# EAGLE board HyperArmBoard_REV2 (EAGLE 8.6.0)
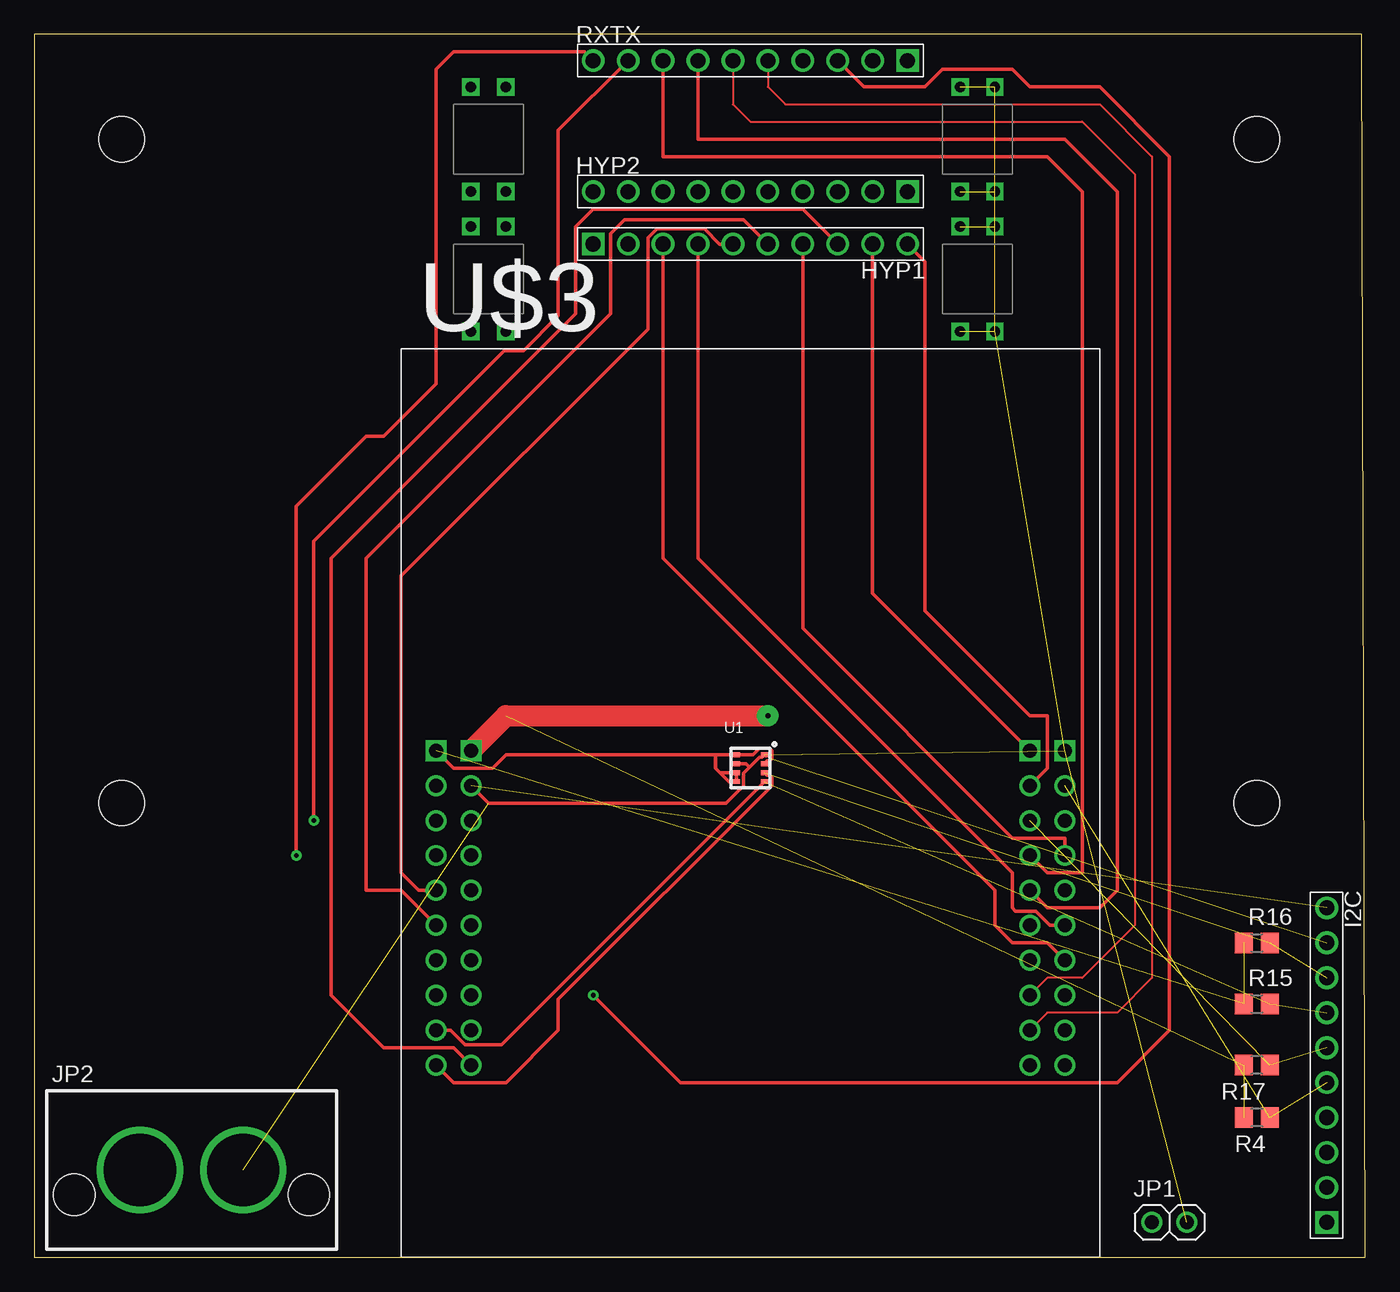
[diagram p0: board, top side]
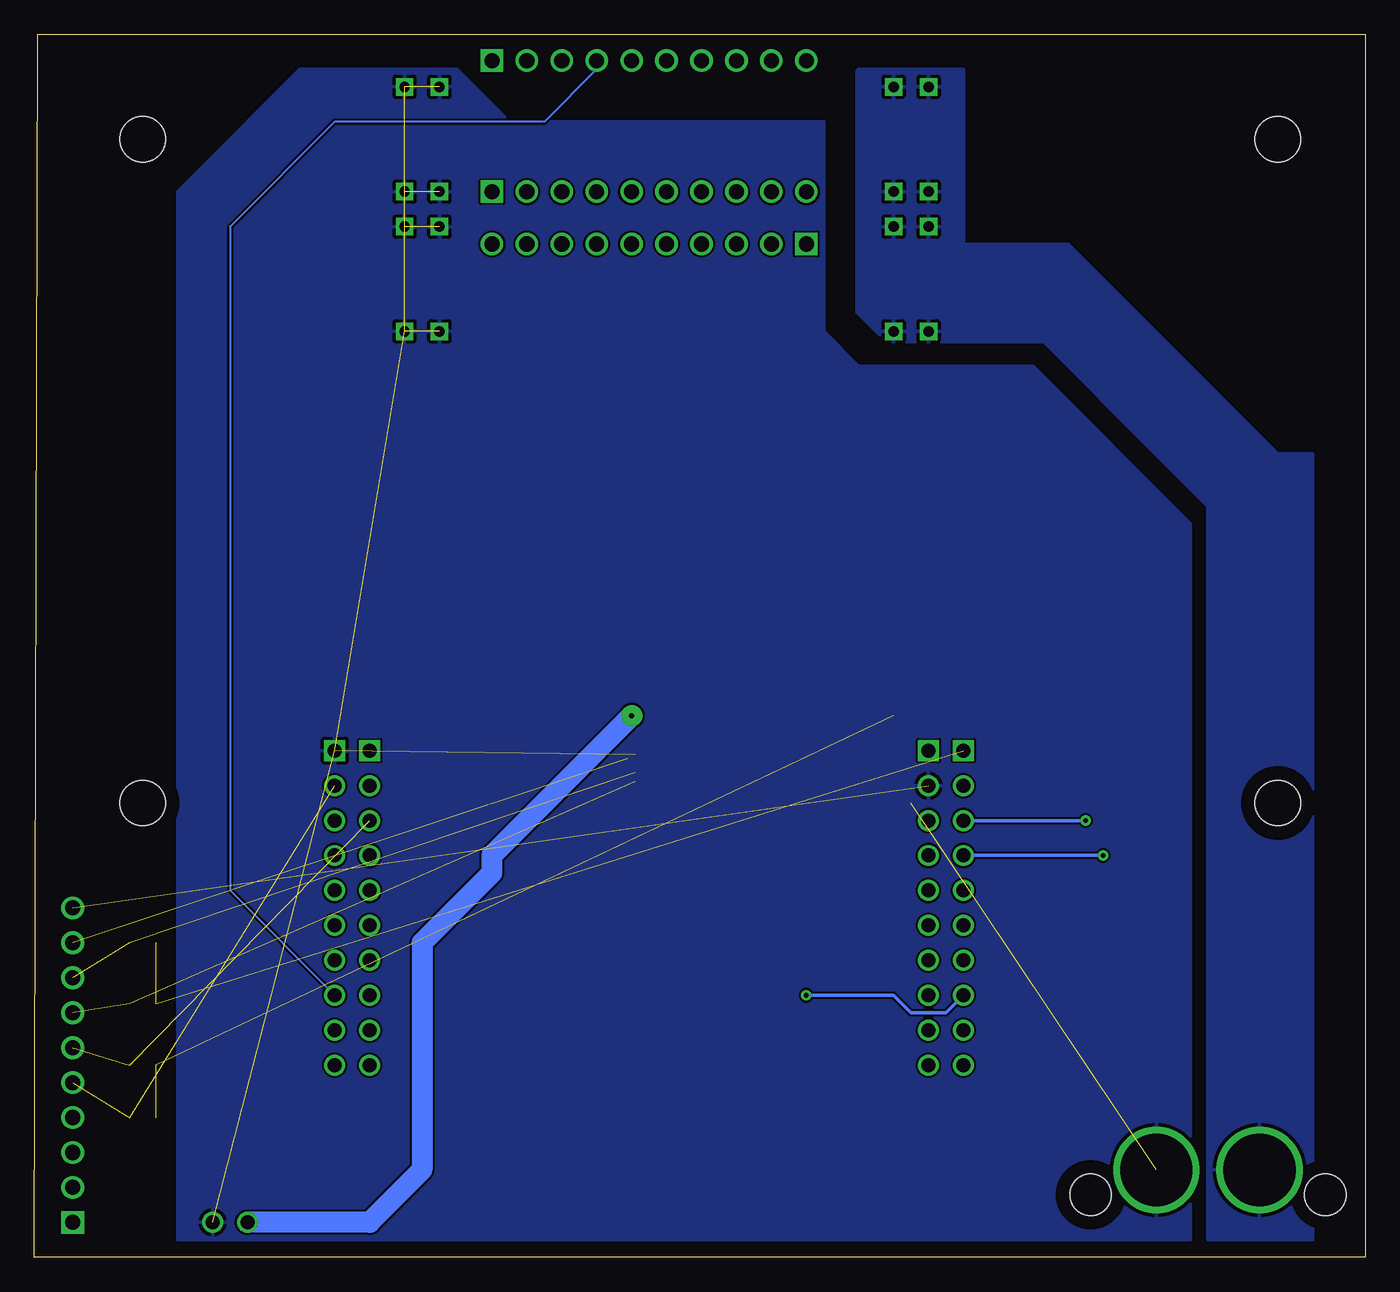
[diagram p1: board, bottom side, seen from below]

Size 96.77 x 88.9 mm. Coordinates in mm from the lower left corner, seen from the top.
Outline: 0,0 96.77,0 96.52,88.9 0,88.9 0,0
Copper layers (1*16): Top 0.035mm / dielectric 1.5mm / Bottom 0.035mm
Design rules "default": minimum track width 6mil, minimum drill 0.35mm, track to track 6mil, track to pad 6mil, pad to pad 6mil, via to via 6mil, smd to smd 6mil, copper to edge 40mil, drill to drill 6mil, minimum pad ring 10mil, minimum via ring 8mil, stop-mask expansion 4mil, vias tented up to drill 0mil, thermal gap 10mil
Holes 3.3 mm at 6.35,33.02 88.9,81.28 88.9,33.02 6.35,81.28

## Footprints (pad centres in the part's own frame; a part is rotated, then mirrored left to right if it is on the bottom)
KK254_10-PIN = drill 1.1 square: P$1 11.43,0 | drill 1.1: P$2 8.89,0; P$3 6.35,0; P$4 3.81,0; P$5 1.27,0; P$6 -1.27,0; P$7 -3.81,0; P$8 -6.35,0; P$9 -8.89,0; P$10 -11.43,0
1X02 = drill 1.016: 1 -1.27,0; 2 1.27,0
SUPERSABRE_2CIRCUIT = drill 5.25: P$1 -3.747,0; P$2 3.747,0 | hole 2.997: -8.534,-1.803; 8.534,-1.803
R0805 = smd 1.3 x 1.5: 1 -0.95,0; 2 0.95,0
BME280_LGA = smd 0.5 x 0.35: P$1 1.025,0.975; P$2 1.025,0.325; P$3 1.025,-0.325; P$4 1.025,-0.975; P$5 -1.025,-0.975; P$6 -1.025,-0.325; P$7 -1.025,0.325; P$8 -1.025,0.975
TIVA-C_EVAL = drill 1.016 square: 1-1 -22.86,3.81; 2-1 22.86,3.81; 3-1 -20.32,3.81; 4-1 20.32,3.81 | drill 1.016: 1-2 -22.86,1.27; 1-3 -22.86,-1.27; 1-4 -22.86,-3.81; 1-5 -22.86,-6.35; 1-6 -22.86,-8.89; 1-7 -22.86,-11.43; 1-8 -22.86,-13.97; 1-9 -22.86,-16.51; 1-10 -22.86,-19.05; 2-2 22.86,1.27; 2-3 22.86,-1.27; 2-4 22.86,-3.81; 2-5 22.86,-6.35; 2-6 22.86,-8.89; 2-7 22.86,-11.43; 2-8 22.86,-13.97; 2-9 22.86,-16.51; 2-10 22.86,-19.05; 3-2 -20.32,1.27; 3-3 -20.32,-1.27; 3-4 -20.32,-3.81; 3-5 -20.32,-6.35; 3-6 -20.32,-8.89; 3-7 -20.32,-11.43; 3-8 -20.32,-13.97; 3-9 -20.32,-16.51; 3-10 -20.32,-19.05; 4-2 20.32,1.27; 4-3 20.32,-1.27; 4-4 20.32,-3.81; 4-5 20.32,-6.35; 4-6 20.32,-8.89; 4-7 20.32,-11.43; 4-8 20.32,-13.97; 4-9 20.32,-16.51; 4-10 20.32,-19.05
4-PIN-BIGPOWER = drill 0.762 square: P$1 -1.27,3.81; P$2 1.27,3.81; P$3 1.27,-3.81; P$4 -1.27,-3.81

## Placement (x,y rotation side)
HYP1  KK254_10-PIN  [KK254_10-PIN]  52.07,73.66 180 top
HYP2  KK254_10-PIN  [KK254_10-PIN]  52.07,77.47 0 top
I2C  KK254_10-PIN  [KK254_10-PIN]  93.98,13.97 270 top
JP1  [1X02]  82.55,2.54 0 top
JP2  PWR  [SUPERSABRE_2CIRCUIT]  11.43,6.35 0 top
R4  5k  [R0805]  88.9,10.16 180 top
R15  5k  [R0805]  88.9,18.41 0 top
R16  5k  [R0805]  88.9,22.86 0 top
R17  5k  [R0805]  88.9,13.97 180 top
RXTX  KK254_10-PIN  [KK254_10-PIN]  52.07,87 0 top
U1  BME280  [BME280_LGA]  52.07,35.56 0 top
U$3  TIVA-C_EVAL  [TIVA-C_EVAL]  52.07,33.02 0 top
U$4  BCS-106-L-D-PE-BE  [4-PIN-BIGPOWER]  33.02,81.28 0 top
U$5  BCS-106-L-D-PE-BE  [4-PIN-BIGPOWER]  33.02,71.12 0 top
U$6  BCS-106-L-D-PE-BE  [4-PIN-BIGPOWER]  68.58,71.12 0 top
U$7  BCS-106-L-D-PE-BE  [4-PIN-BIGPOWER]  68.58,81.28 0 top

## Library data of the parts
HYP1 HYP2 I2C JP2 RXTX = molex
JP1 = pinhead
R4 R15-R17 = resistor
U1 = BME280ComponentLibrary; PROD_ID: IC-13090
U$3 = texas
U$4-U$7 = samtec

## Nets
3.3V: I2C.P$9 R15.1 R16.1 U1.P$2 U1.P$5 U1.P$6 U1.P$8 U$3.1-1
5V: JP1.1 R4.2 R17.2 U$3.3-1
BIGVIN: JP2.P$1 U$4.P$1 U$4.P$2 U$4.P$3 U$4.P$4 U$5.P$1 U$5.P$2 U$5.P$3 U$5.P$4
CS_0: U$3.2-9
CS_2: U$3.1-2
DGND: I2C.P$10 JP1.2 JP2.P$2 U1.P$1 U1.P$7 U$3.2-1 U$3.3-2 U$6.P$1 U$6.P$2 U$6.P$3 U$6.P$4 U$7.P$1 U$7.P$2 U$7.P$3 U$7.P$4
MISO_0: RXTX.P$4 U$3.2-8
MISO_3: U$3.3-5
MOSI_0: RXTX.P$3 U$3.1-8
MOSI_3: U$3.3-6
PE2: U$3.3-8
PE3: U$3.3-9
PUSH1: U$3.4-10
PWM0: HYP1.P$3 U$3.2-7
PWM1: HYP1.P$4 U$3.2-6
PWM2: HYP1.P$5 U$3.1-5
PWM3: HYP1.P$6 U$3.1-6
PWM4: HYP1.P$7 U$3.2-4
PWM5: HYP1.P$8 U$3.3-10
PWM6: HYP1.P$9 U$3.4-1
PWM7: HYP1.P$10 U$3.4-2
RES: U$3.2-5
RX_CF: U$3.2-3
RX_MC: RXTX.P$8 U$3.4-4
RX_MD: RXTX.P$6 U$3.4-8
RX_MF: RXTX.P$9 U$3.1-3
RX_SF: U$3.4-6
SCK_0: U$3.2-10
SCL_0: I2C.P$5 R4.1 U$3.2-2
SCL_1: I2C.P$7 R15.2 U1.P$4 U$3.1-9
SDA_0: I2C.P$6 R17.1 U$3.4-3
SDA_1: I2C.P$8 R16.2 U1.P$3 U$3.1-10
SPI_CLK_2: U$3.1-7
TX_CF: U$3.3-7
TX_MC: RXTX.P$7 U$3.4-5
TX_MD: RXTX.P$5 U$3.4-9
TX_MF: RXTX.P$10 U$3.1-4
TX_SF: U$3.4-7

## Tracks (layer width: path | path; a pad name or v marks a point on that pad's centre or on a via)
3.3V  (3 unrouted)
  Top 0.254: 49.53,36.53 U1.P$8 52.27,36.53 52.73,36.99 53.46,36.99 53.62,36.83 53.62,36.24 53.46,36.08 53.29,36.08 U1.P$2 | 49.53,36.53 34.29,36.53 33.31,35.56 30.48,35.56 U$3.1-1 | 49.53,36.53 49.53,35.56 49.85,35.23 | 49.85,35.23 50.51,34.59 U1.P$5 U1.P$6 49.85,35.23
5V  (via drill 0.35 pad 1.55)  (2 unrouted)
  Top 1.524: U$3.3-1 34.29,39.37 v53.34,39.37
  Bottom 1.524: JP1.1 72.39,2.54 68.58,6.35 68.58,22.86 63.5,27.94 63.5,29.21 v53.34,39.37
BIGVIN
  pour Bottom: 3.81,1.27 11.43,1.27 11.43,54.61 15.24,58.42 23.37,66.55 24.51,66.55 34.8,66.55 36.96,68.71 36.96,86.23 36.83,86.36 29.21,86.36 29.21,73.66 21.59,73.66 6.35,58.42 3.81,58.42
DGND  (12 unrouted)
  Top 0.254: U1.P$1 52.9,36.34 52.73,36.34 52.01,35.62 | 52.01,35.62 51.57,35.19 51.57,34.29 50.3,33.02 33.02,33.02 U$3.3-2 | U1.P$7 51.74,35.88 52.01,35.62
  pour Bottom: 12.7,1.27 12.7,53.34 24.13,64.77 36.83,64.77 39.37,67.31 39.37,82.55 62.23,82.55 66.04,86.36 77.47,86.36 85.09,78.74 86.36,77.47 86.36,1.27
MISO_0
  Bottom 0.152: RXTX.P$4 55.88,86.36 59.69,82.55 74.93,82.55 82.55,74.93 82.55,26.67 U$3.2-8
MOSI_0  (via drill 0.35)
  Top 0.254: RXTX.P$3 60.33,85.09 64.77,85.09 66.04,86.36 71.12,86.36 72.39,85.09 77.47,85.09 82.55,80.01 82.55,16.51 78.74,12.7 46.99,12.7 v40.64,19.05
  Bottom 0.254: v40.64,19.05 34.29,19.05 33.02,17.78 30.48,17.78 U$3.1-8
PWM0
  Top 0.254: HYP1.P$3 45.72,50.8 69.85,26.67 69.85,24.13 71.12,22.86 73.66,22.86 U$3.2-7
PWM1
  Top 0.254: U$3.2-6 73.86,24.13 72.82,25.17 71.35,25.17 71.12,25.4 71.12,27.94 48.26,50.8 HYP1.P$4
PWM2
  Top 0.254: HYP1.P$5 49.82,73.66 48.72,74.76 45.26,74.76 44.62,74.12 44.62,67.48 26.67,49.53 26.67,27.94 27.94,26.67 U$3.1-5
PWM3
  Top 0.254: U$3.1-6 26.67,26.67 24.13,26.67 24.13,50.8 41.91,68.58 41.91,74.42 42.93,75.44 51.56,75.44 HYP1.P$6
PWM4
  Top 0.254: HYP1.P$7 55.88,45.72 71.12,30.48 74.93,30.48 U$3.2-4
PWM5
  Top 0.254: HYP1.P$8 55.88,76.2 40.64,76.2 39.37,74.93 39.37,68.58 21.59,50.8 21.59,19.05 25.4,15.24 30.48,15.24 U$3.3-10
PWM6
  Top 0.254: HYP1.P$9 60.96,48.26 U$3.4-1
PWM7
  Top 0.254: HYP1.P$10 64.77,72.39 64.77,46.99 72.39,39.37 73.66,39.37 73.66,35.56 U$3.4-2
RX_MC
  Top 0.254: RXTX.P$8 45.72,80.01 73.66,80.01 76.2,77.47 76.2,27.94 73.66,27.94 U$3.4-4
RX_MD
  Top 0.152: RXTX.P$6 50.8,83.82 52.07,82.55 76.2,82.55 80.01,78.74 80.01,24.13 76.2,20.32 73.66,20.32 U$3.4-8
RX_MF  (via drill 0.35)
  Top 0.254: v20.32,31.75 20.32,52.07 34.16,65.91 35.56,65.91 38.1,68.45 38.1,81.92 RXTX.P$9
  Bottom 0.254: U$3.1-3 v20.32,31.75
SCL_0  (2 unrouted)
SCL_1  (2 unrouted)
  Top 0.254: U$3.1-9 30.28,16.51 31.32,15.47 33.98,15.47 U1.P$4
SDA_0  (2 unrouted)
SDA_1  (2 unrouted)
  Top 0.254: U1.P$3 53.29,35.04 53.46,35.04 53.62,34.88 53.62,34.29 38.1,18.77 38.1,16.51 34.29,12.7 30.48,12.7 U$3.1-10
TX_MC
  Top 0.254: RXTX.P$7 48.26,81.28 74.93,81.28 78.74,77.47 78.74,26.67 77.47,25.4 73.66,25.4 U$3.4-5
TX_MD
  Top 0.152: RXTX.P$5 53.34,85.09 54.61,83.82 77.47,83.82 81.28,80.01 81.28,20.32 78.74,17.78 73.66,17.78 U$3.4-9
TX_MF  (via drill 0.35)
  Top 0.254: v19.05,29.21 19.05,54.61 24.13,59.69 25.4,59.69 29.21,63.5 29.21,86.36 30.48,87.63 40.01,87.63 RXTX.P$10
  Bottom 0.254: U$3.1-4 v19.05,29.21